# EAGLE board untitled (EAGLE 6.1)
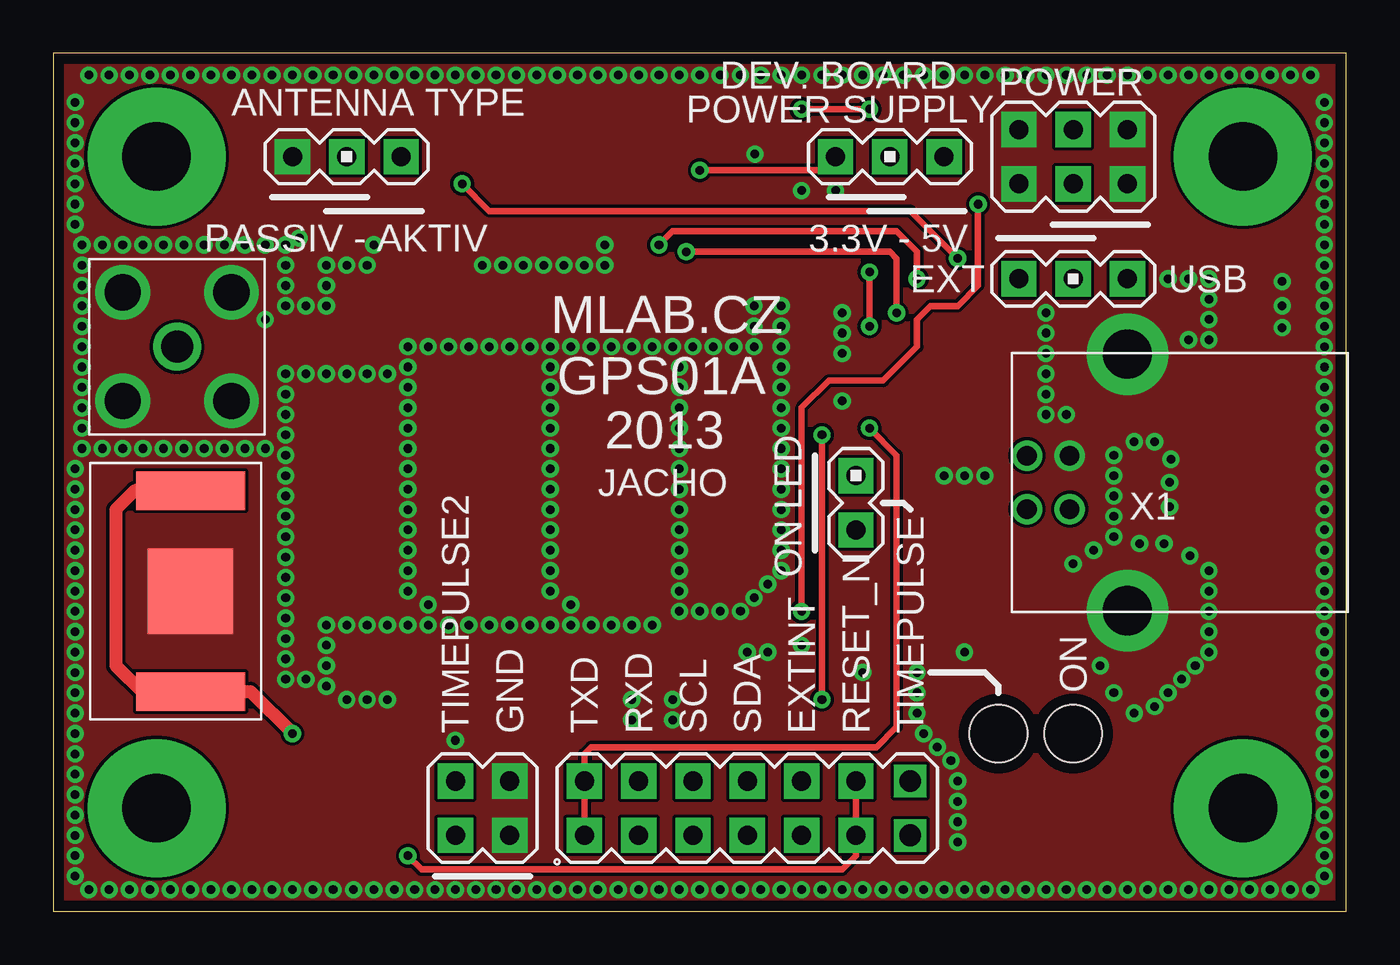
[diagram p0: board, top side]
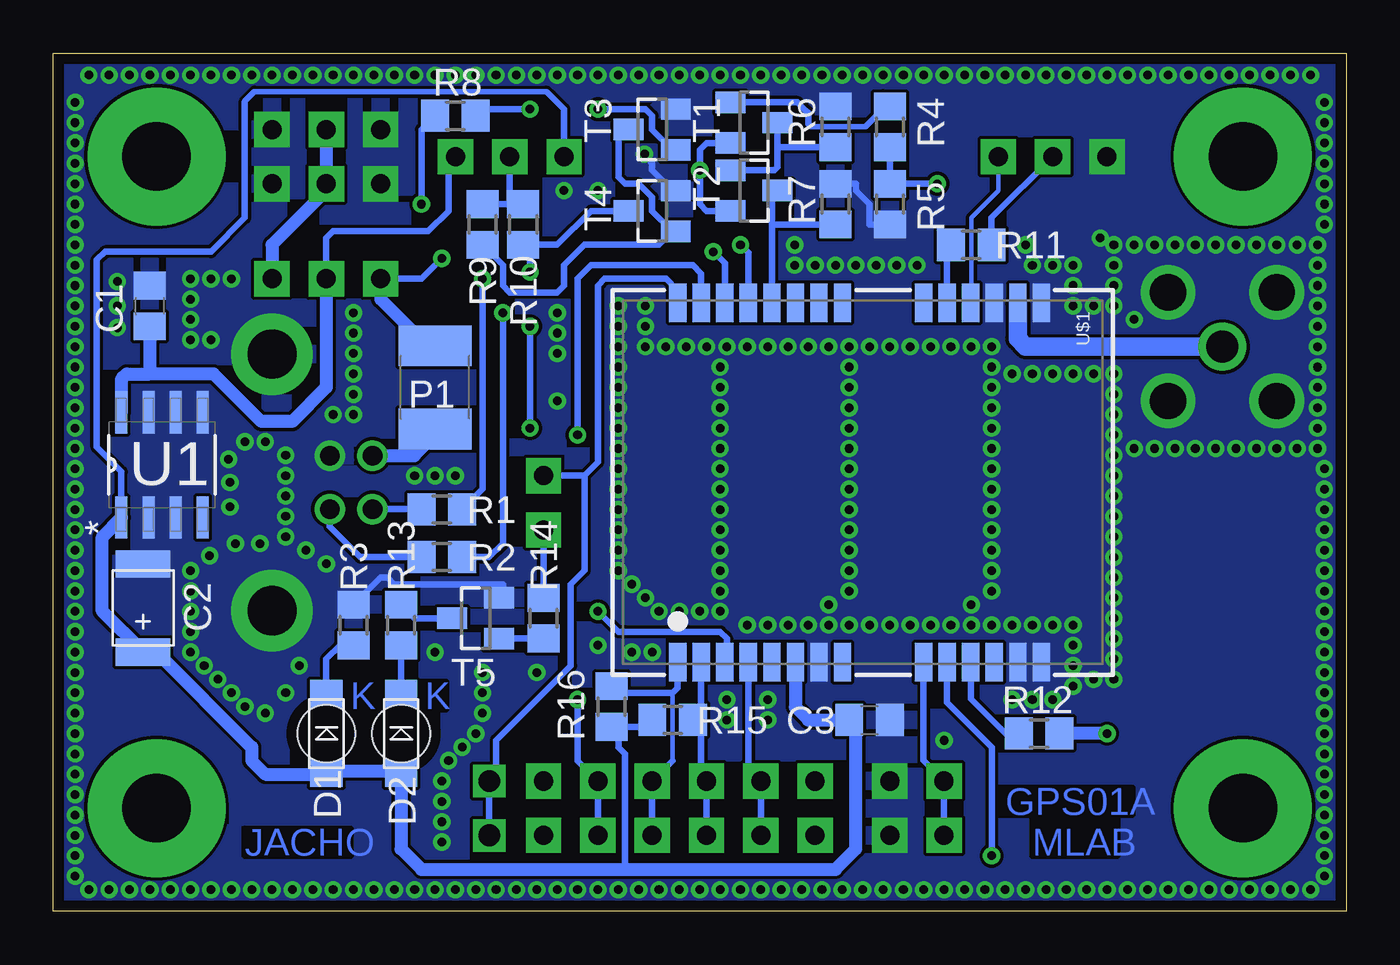
[diagram p1: board, bottom side, seen from below]

Size 60.45 x 40.13 mm. Coordinates in mm from the lower left corner, seen from the top.
Outline: 0,0 60.45,0 60.45,40.13 0,40.13 0,0
Copper layers (1*16): Top 0.035mm / dielectric 1.5mm / Bottom 0.035mm
Design rules: minimum track width 8mil, minimum drill 16mil, track to track 6mil, track to pad 6mil, pad to pad 6mil, via to via 6mil, smd to smd 6mil, copper to edge 20mil, drill to drill 8mil, minimum pad ring 10mil, minimum via ring 8mil, stop-mask expansion 4mil, vias tented up to drill 25mil, thermal gap 0mil

## Footprints (pad centres in the part's own frame; a part is rotated, then mirrored left to right if it is on the bottom)
C0805 = smd 1.3 x 1.5: 1 -0.95,0; 2 0.95,0
B = smd 1.27 x 2.54: + 2.223,0; - -1.905,0
1206 = smd 1.5 x 1.5: A 0,-1.75; K 0,1.75 | hole 2.7: 0,0
1812 = smd 1.9 x 3.4: 1 -1.95,0; 2 1.95,0
0805 = smd 1.3 x 1.5: 1 -0.95,0; 2 0.95,0
MA03-1 = drill 0.889 pad 1.651 square: 1 -2.54,0; 2 0,0; 3 2.54,0
MA03-2 = drill 0.889 pad 1.651 square: 1 -2.54,-1.27; 2 -2.54,1.27; 3 0,-1.27; 4 0,1.27; 5 2.54,-1.27; 6 2.54,1.27
MA02-2 = drill 0.889 pad 1.651 square: 1 -1.27,-1.27; 2 -1.27,1.27; 3 1.27,-1.27; 4 1.27,1.27
MA07-2 = drill 0.889 pad 1.651 square: 1 -7.62,-1.27; 2 -7.62,1.27; 3 -5.08,-1.27; 4 -5.08,1.27; 5 -2.54,-1.27; 6 -2.54,1.27; 7 0,-1.27; 8 0,1.27; 9 2.54,-1.27; 10 2.54,1.27; 11 5.08,-1.27; 12 5.08,1.27 | drill 1.016 square: 13 7.62,-1.27; 14 7.62,1.27
MA02-1 = drill 0.889 pad 1.651 square: 1 -1.27,0; 2 1.27,0
BAT6MM8 = smd 1.8 x 5.1: 1+ -4.7,0; 2+ 4.7,0 | smd 4 x 4: - 0,0
SMA = drill 1.5: + 0,0 | drill 1.7: -1 -2.54,2.54; -2 2.54,2.54; -3 -2.54,-2.54; -4 2.54,-2.54
SOT23 = smd 1 x 1.4: 1 -0.95,-1.1; 2 0.95,-1.1; 3 0,1.1
SOIC127P600X175-8N = smd 1.981 x 0.559: 1 -2.464,1.905; 2 -2.464,0.635; 3 -2.464,-0.635; 4 -2.464,-1.905; 5 2.464,-1.905; 6 2.464,-0.635; 7 2.464,0.635; 8 2.464,1.905
UBLOX-LEA-6 = smd 1.8 x 0.8: 1 8.4,-8.65; 2 8.4,-7.55; 3 8.4,-6.45; 4 8.4,-5.35; 5 8.4,-4.25; 6 8.4,-3.15; 7 8.4,-2.05; 8 8.4,-0.95; 9 8.4,2.85; 10 8.4,3.95; 11 8.4,5.05; 12 8.4,6.15; 13 8.4,7.25; 14 8.4,8.35; 15 -8.4,8.35; 16 -8.4,7.25; 17 -8.4,6.15; 18 -8.4,5.05; 19 -8.4,3.95; 20 -8.4,2.85; 21 -8.4,-0.95; 22 -8.4,-2.05; 23 -8.4,-3.15; 24 -8.4,-4.25; 25 -8.4,-5.35; 26 -8.4,-6.45; 27 -8.4,-7.55; 28 -8.4,-8.65
USB_B = drill 0.92 pad 1.422: 1 1.25,4.7; 2 -1.25,4.7; 3 -1.25,2.7; 4 1.25,2.7 | drill 2.3 pad 3.81: GND -6,0; GND2 6,0
SROUB3M = drill 3.2 pad 6.452: P$1 0,0

## Placement (x,y rotation side)
C1  100nF  [C0805]  55.94,28.32 90 bottom
C2  10uF  [B]  56.26,14.35 270 bottom
C3  100nF  [C0805]  22.29,8.95 0 bottom
D1  CERVENA  [1206]  47.69,8.32 0 bottom
D2  ZELENA  [1206]  44.2,8.32 0 bottom
P1  [1812]  42.61,24.51 90 bottom
R1  33  [0805]  42.29,18.8 0 bottom
R2  33  [0805]  42.29,16.57 0 bottom
R3  150R  [0805]  46.42,13.4 270 bottom
R4  1k  [0805]  21.34,36.7 90 bottom
R5  4k7  [0805]  21.34,33.08 90 bottom
R6  4k7  [0805]  23.88,36.7 270 bottom
R7  4k7  [0805]  23.88,33.08 270 bottom
R8  1k  [0805]  41.66,37.21 0 bottom
R9  4k7  [0805]  40.39,32.13 270 bottom
R10  4k7  [0805]  38.48,32.13 270 bottom
R11  10  [0805]  17.53,31.18 180 bottom
R12  100  [0805]  14.35,8.32 0 bottom
R13  150R  [0805]  44.2,13.4 270 bottom
R14  [0805]  37.53,13.72 270 bottom
R15  4k7  [0805]  31.5,8.95 180 bottom
R16  4k7  [0805]  34.35,9.59 270 bottom
SV1  [MA03-1]  47.69,29.59 180 top
SV2  [MA03-2]  47.69,35.31 180 top
SV3  [MA03-1]  39.12,35.31 0 top
SV4  [MA03-1]  13.72,35.31 0 top
SV5  [MA02-2]  20.07,4.83 0 top
SV6  [MA07-2]  32.45,4.83 0 top
SV7  MA02-1  [MA02-1]  37.53,19.11 90 top
SW1  1.55V  [BAT6MM8]  6.41,14.99 90 top
SW2  [SMA]  5.78,26.42 90 top
T1  BC807  [SOT23]  27.69,36.89 270 bottom
T2  BC807  [SOT23]  27.69,33.72 270 bottom
T3  BC817  [SOT23]  32.45,36.58 90 bottom
T4  BC817  [SOT23]  32.45,32.77 90 bottom
T5  BC817  [SOT23]  40.7,13.72 90 bottom
U1  LE33CD-TR  [SOIC127P600X175-8N]  55.37,20.89 90 bottom
U$1  UBLOX-LEA-6  [UBLOX-LEA-6]  22.61,20.07 270 bottom
X1  [USB_B]  50.23,20.07 90 top
X2  SROUB3M  [SROUB3M]  4.83,4.83 0 top
X3  SROUB3M  [SROUB3M]  4.83,35.31 0 top
X4  SROUB3M  [SROUB3M]  55.63,4.83 0 top
X5  SROUB3M  [SROUB3M]  55.63,35.31 0 top

## Library data of the parts
C1-C3 = moje_C
D1 D2 = moje_diody
P1 X2-X5 = moje
R1-R16 = moje_R
SV1-SV4 SV6 = moje_hrebinky; OC_FARNELL: unknown; OC_NEWARK: unknown
SV5 SV7 = moje_hrebinky
SW1 = moje_baterky
SW2 X1 = moje_konektory
T1-T5 = moje_T
U1 = moje_U; MPN: LE33CD-TR; OC_FARNELL: 1652371; OC_NEWARK: 89K1279; PACKAGE: SOIC-8; SUPPLIER: STMICROELECTRONICS
U$1 = 3DRobotics; DATASHEET: http://www.u-blox.com/images/downloads/Product_Docs/LEA-6_DataSheet_%28GPS.G6-HW-09004%29.pdf; LINK: http://www.u-blox.com/en/gps-modules/pvt-modules/lea-6-family.html; MFGPN: LEA-6

## Nets
+3.3V: C2.+ C3.1 D1.A D2.A R15.2 R16.2 SV3.1 T1.2 T2.2 U1.1 U$1.6
+5V: C1.1 SV1.2 SV3.3 U1.8
EXTINT: SV6.9 SV6.10 U$1.27
GND: C1.2 C2.- C3.2 R3.1 R5.1 R6.1 R7.1 SV2.1 SV2.2 SV2.5 SV2.6 SV4.1 SV5.3 SV5.4 SW1.- SW2.-1 SW2.-2 SW2.-3 SW2.-4 T3.2 T4.2 T5.2 U1.2 U1.3 U1.5 U1.6 U1.7 U$1.7 U$1.13 U$1.14 U$1.15 U$1.17 X1.4 X1.GND X1.GND2
N$1: SW2.+ U$1.16
N$2: SV1.1 SV2.3 SV2.4
N$3: R1.1 X1.2
N$4: R2.1 X1.3
N$5: P1.1 X1.1
N$6: R8.2 T3.1
N$7: R9.2 T3.3 T4.1
N$8: R4.2 T1.1
N$9: D1.K R3.2
N$10: R6.2 T1.3 T2.1
N$11: R11.2 U$1.19
N$12: R9.1 R10.1 SV3.2
N$13: R11.1 SV4.2
N$14: R12.1 U$1.11
N$15: R12.2 SW1.1+ SW1.2+
N$16: SV5.1 SV5.2 U$1.9
N$24: D2.K R13.2
N$25: R13.1 T5.3
N$26: R14.2 T5.1
N$27: R14.1 SV7.1
RESET_N: SV6.11 SV6.12 U$1.10
RXD: SV6.3 SV6.4 U$1.4
SCL: R15.1 SV6.5 SV6.6 U$1.2
SDA: R16.1 SV6.7 SV6.8 U$1.1
TIMEPULSE: SV6.13 SV6.14 SV7.2 U$1.28
TXD: R10.2 SV6.1 SV6.2 T4.3
TXD1: R8.1 U$1.3
USB_DET: R7.2 T2.3 U$1.24
USB_DM: R1.2 U$1.25
USB_DP: R2.2 U$1.26
VCC_RF: SV4.3 U$1.18
VDD_USB: P1.2 R4.1 R5.2 SV1.3

## Tracks (layer width: path | path; a pad name or v marks a point on that pad's centre or on a via)
+3.3V  (via drill 0.4)
  Top 0.305: v30.23,34.67 35.94,34.67 SV3.1
  Bottom 0.254: 51.5,37.85 51.5,37.91 51.05,38.35 37.4,38.35 37.21,38.16
  Bottom 0.305: T2.2 29.91,32.77 30.23,33.08 v30.23,34.67 30.23,35.62 29.91,35.94 T1.2 | R15.2 32.76,8.64 R16.2 34.04,8.64 34.04,7.68 33.72,7.37 33.72,1.97 | 28.64,32.77 T2.2 | T2.2 | 51.5,37.85 51.5,32.45 53.09,30.86 58.04,30.86 58.42,30.48 58.42,21.72 57.28,20.57 U1.1 | SV3.1 36.58,37.53 37.21,38.16
  Bottom 0.61: U$1.6 25.76,9.56 25.15,8.95 C3.1 22.92,8.64 22.92,2.92 23.88,1.97 33.72,1.97 43.24,1.97 44.2,2.92 D2.A D1.A 47.84,6.41 50.55,6.41 51.18,7.05 51.18,7.68 55.63,12.13 C2.+ 58.17,14.03 58.17,17.53 U1.1
+5V
  Bottom 0.305: SV1.2 47.69,31.5 47.37,31.81 42.93,31.81 41.97,32.77 41.97,34.99 SV3.3
  Bottom 0.61: SV1.2 47.69,24.51 49.28,22.92 50.74,22.92 52.96,25.15 55.94,25.15 | C1.1 55.94,25.15 | U1.8 57.28,24.89 57.02,25.15 55.94,25.15
EXTINT  (via drill 0.4)
  Top 0.305: v35.94,22.29 v35.94,9.91
  Bottom 0.305: U$1.27 30.16,29.84 30.54,30.23 35.31,30.23 35.94,29.59 v35.94,22.29 | v35.94,9.91 35.94,7.05 SV6.10 SV6.9
GND  (via drill 0.4)
  Bottom 0.305: R5.1 21.34,32.45 | R5.1 21.34,31.81 | R7.1 22.93,34.03 22.92,34.04 22.92,33.72 22.29,33.08 22.29,32.13 R5.1 | R3.1 45.15,15.62 44.83,15.62 44.51,15.3 39.43,15.3 39.43,14.84 T5.2 | T4.2 31.49,33.72 32.45,34.67 32.45,34.99 v32.81,35.43
  other vias: 11.49,31.5 2.29,31.18 3.24,31.18 4.19,31.18 5.14,31.18 6.1,31.18 7.05,31.18 8,31.18 8.95,31.18 9.91,31.18 10.86,31.18 10.86,30.23 10.86,29.27 10.86,28.32 9.91,27.69 1.33,31.18 1.33,30.23 1.33,29.27 1.33,28.32 1.33,27.37 1.33,26.42 1.33,25.46 1.33,24.51 1.33,23.56 1.33,22.61 1.33,21.65 2.29,21.65 3.24,21.65 4.19,21.65 5.14,21.65 6.1,21.65 7.05,21.65 8,21.65 8.95,21.65 9.91,21.65 10.86,21.34 10.86,22.29 10.86,23.24 10.86,24.19 10.86,25.15 11.81,28.32 11.81,25.15 12.76,28.32 12.76,25.15 13.72,25.15 14.67,25.15 15.62,25.15 16.57,25.46 16.57,26.42 17.53,26.42 18.48,26.42 19.43,26.42 20.38,26.42 21.34,26.42 22.29,26.42 23.24,26.42 24.19,26.42 25.15,26.42 26.1,26.42 27.05,26.42 28,26.42 28.96,26.42 29.91,26.42 30.86,26.42 31.81,26.42 32.77,26.42 32.77,27.37 32.77,28.32 34.04,28.32 34.04,27.37 34.04,26.42 34.04,25.46 34.04,24.51 34.04,23.56 34.04,22.61 34.04,21.65 34.04,20.7 34.04,19.75 34.04,18.8 34.04,17.84 34.04,16.89 34.04,15.94 33.4,15.3 32.77,14.67 32.13,14.03 31.18,14.03 30.23,14.03 29.27,14.03 28,13.4 27.05,13.4 26.1,13.4 25.15,13.4 24.19,13.4 23.24,13.4 22.29,13.4 21.34,13.4 20.38,13.4 19.43,13.4 18.48,13.4 17.53,13.4 16.57,13.4 15.62,13.4 14.67,13.4 13.72,13.4 12.76,13.4 12.76,12.45 12.76,11.49 12.76,10.54 13.72,9.91 14.67,9.91 15.62,9.91 10.86,20.38 10.86,19.43 10.86,18.48 10.86,17.53 10.86,16.57 10.86,15.62 10.86,14.67 10.86,13.72 10.86,12.76 10.86,11.81 10.86,10.86 11.81,10.86 12.76,29.27 12.76,30.23 13.72,30.23 14.67,30.23 14.99,31.18 20.07,30.23 21.02,30.23 21.97,30.23 22.92,30.23 23.88,30.23 24.83,30.23 25.78,30.23 25.78,31.18 29.27,14.99 29.27,15.94 29.27,16.89 29.27,17.84 29.27,18.8 29.27,19.75 29.27,20.7 29.27,21.65 29.27,22.61 29.27,23.56 29.27,24.51 29.27,25.46 23.24,25.46 23.24,24.51 23.24,23.56 23.24,22.61 23.24,21.65 23.24,20.7 23.24,19.75 23.24,18.8 23.24,17.84 23.24,16.89 23.24,15.94 23.24,14.99 24.19,14.35 16.57,24.51 16.57,23.56 16.57,22.61 16.57,21.65 16.57,20.7 16.57,19.75 16.57,18.8 16.57,17.84 16.57,16.89 16.57,15.94 16.57,14.99 17.53,14.35 18.8,8 42.29,3.24 42.29,4.19 42.29,5.14 42.29,6.1 41.97,7.05 41.34,7.68 40.7,8.32 40.39,9.27 40.39,10.22 40.39,11.18 37.85,11.18 42.61,12.13 27.05,9.91 27.05,8.95 28.96,9.91 28.96,8.95 34.99,12.45 32.45,12.13 33.4,12.13 41.66,20.38 42.61,20.38 43.56,20.38 36.89,28 36.89,27.05 36.89,23.88 46.42,28 46.42,27.05 46.42,26.1 46.42,25.15 46.42,24.19 46.42,23.24 47.37,23.24 53.09,26.73 54.04,26.73 54.04,27.69 54.04,28.64 54.04,29.59 53.09,29.59 52.13,29.59 47.69,16.26 48.64,16.89 49.59,17.53 49.59,18.48 49.59,19.43 49.59,20.38 49.59,21.34 50.55,21.97 51.5,21.97 52.2,18.92 50.8,17.21 50.55,9.27 49.59,10.22 48.96,11.49 51.5,9.59 52.13,10.22 52.77,10.86 53.4,11.49 54.04,12.13 54.04,13.08 54.04,14.03 54.04,14.99 54.04,15.94 53.15,16.64 51.94,17.21 52.2,20.07 52.26,21.15 1.65,1.02 2.6,1.02 3.56,1.02 4.51,1.02 5.46,1.02 6.41,1.02 7.37,1.02 8.32,1.02 9.27,1.02 10.22,1.02 11.18,1.02 12.13,1.02 13.08,1.02 14.03,1.02 14.99,1.02 15.94,1.02 16.89,1.02 17.84,1.02 18.8,1.02 19.75,1.02 20.7,1.02 21.65,1.02 22.61,1.02 23.56,1.02 24.51,1.02 25.46,1.02 26.42,1.02 27.37,1.02 28.32,1.02 29.27,1.02 30.23,1.02 31.18,1.02 32.13,1.02 33.08,1.02 34.04,1.02 34.99,1.02 35.94,1.02 36.89,1.02 37.85,1.02 38.8,1.02 39.75,1.02 40.7,1.02 41.66,1.02 42.61,1.02 43.56,1.02 44.51,1.02 45.47,1.02 46.42,1.02 47.37,1.02 48.32,1.02 49.28,1.02 50.23,1.02 51.18,1.02 52.13,1.02 53.09,1.02 54.04,1.02 54.99,1.02 55.94,1.02 56.9,1.02 57.85,1.02 58.8,1.02 1.65,39.12 2.6,39.12 3.56,39.12 4.51,39.12 5.46,39.12 6.41,39.12 7.37,39.12 8.32,39.12 9.27,39.12 10.22,39.12 11.18,39.12 12.13,39.12 13.08,39.12 14.03,39.12 14.99,39.12 15.94,39.12 16.89,39.12 17.84,39.12 18.8,39.12 19.75,39.12 20.7,39.12 21.65,39.12 22.61,39.12 23.56,39.12 24.51,39.12 25.46,39.12 26.42,39.12 27.37,39.12 28.32,39.12 29.27,39.12 30.23,39.12 31.18,39.12 32.13,39.12 33.08,39.12 34.04,39.12 34.99,39.12 35.94,39.12 36.89,39.12 37.85,39.12 38.8,39.12 39.75,39.12 40.7,39.12 41.66,39.12 42.61,39.12 43.56,39.12 44.51,39.12 45.47,39.12 46.42,39.12 47.37,39.12 48.32,39.12 49.28,39.12 50.23,39.12 51.18,39.12 52.13,39.12 53.09,39.12 54.04,39.12 54.99,39.12 55.94,39.12 56.9,39.12 57.85,39.12 58.8,39.12 59.44,1.65 59.44,2.6 59.44,3.56 59.44,4.51 59.44,5.46 59.44,6.41 59.44,7.37 59.44,8.32 59.44,9.27 59.44,10.22 59.44,11.18 59.44,12.13 59.44,13.08 59.44,14.03 59.44,14.99 59.44,15.94 59.44,16.89 59.44,17.84 59.44,18.8 59.44,19.75 59.44,20.7 59.44,21.65 59.44,22.61 59.44,23.56 59.44,24.51 59.44,25.46 59.44,26.42 59.44,27.37 59.44,28.32 59.44,29.27 59.44,30.23 59.44,31.18 59.44,32.13 59.44,33.08 59.44,34.04 59.44,34.99 59.44,35.94 59.44,36.89 59.44,37.85 1.02,1.65 1.02,2.6 1.02,3.56 1.02,4.51 1.02,5.46 1.02,6.41 1.02,7.37 1.02,8.32 1.02,9.27 1.02,10.22 1.02,11.18 1.02,12.13 1.02,13.08 1.02,14.03 1.02,14.99 1.02,15.94 1.02,16.89 1.02,17.84 1.02,18.8 1.02,19.75 1.02,20.7 1.02,32.13 1.02,33.08 1.02,34.04 1.02,34.99 1.02,35.94 1.02,36.89 1.02,37.85 34.99,33.72 36.58,33.72 36.89,26.1 57.47,29.46 57.47,28.32 57.47,27.3
  pour Bottom: -0.25,40.39 -0.57,40.39 -0.57,-0.25 61.34,-0.25 61.34,40.39
  pour Top: -0.25,40.39 -0.57,40.39 -0.57,0.06 -0.57,-0.57 61.02,-0.57 61.02,40.39
N$1
  Bottom 0.861: U$1.16 15.36,26.79 14.99,26.42 SW2.+
N$2
  Bottom 0.61: SV2.3 SV2.4 47.69,33.72 50.23,31.18 SV1.1
N$3
  Bottom 0.305: X1.2 43.26,18.82 R1.1
N$4
  Bottom 0.305: X1.3 47.53,18 46.1,16.57 R2.1
N$5
  Bottom 0.61: X1.1 43.58,21.32 42.29,22.61 P1.1
N$6  (via drill 0.4)
  Top 0.305: v34.99,37.53 v38.16,37.53
  Bottom 0.305: 31.18,35.63 T3.1 31.5,35.63 32.45,36.58 32.45,37.21 32.77,37.53 v34.99,37.53 | R8.2 40.39,37.53 v38.16,37.53
N$7
  Bottom 0.305: 31.5,31.82 T4.1 | 31.5,31.82 32.45,32.77 32.45,33.4 33.08,34.04 33.72,34.04 34.04,34.35 34.04,36.58 33.72,36.58 T3.3 33.4,36.58 | 31.5,31.82 31.5,31.81 32.13,31.18 35.62,31.18 36.58,30.23 36.58,29.27 36.89,28.96 39.12,28.96 39.43,29.27 39.43,30.23 R9.2
N$8
  Bottom 0.254: 22.35,36.83 22.48,36.7 25.02,36.7 25.15,36.83
  Bottom 0.305: R4.2 21.66,38.16 21.66,37.53 22.35,36.83 | T1.1 25.65,37.85 25.27,37.47 25.15,37.34 25.15,36.83
N$9
  Bottom 0.305: R3.2 47.05,12.45 47.69,11.81 D1.K 47.69,9.91
N$10
  Bottom 0.305: T1.3 26.59,36.26 | 26.59,36.26 26.59,35.81 | 26.59,35.81 26.59,34.82 26.73,34.67 T2.1 | 26.58,36.26 26.59,36.26 | R6.2 26.52,35.75 26.59,35.81
N$11
  Bottom 0.305: U$1.19 18.66,31 R11.2
N$12
  Bottom 0.305: R10.1 39.12,33.08 | 39.12,33.08 R9.1 | SV3.2 39.12,33.08
N$13
  Bottom 0.305: R11.1 16.58,32.45 SV4.2
N$14
  Bottom 0.305: U$1.11 17.56,9.94 15.94,8.32 R12.1
N$15  (via drill 0.4)
  Top 0.61: SW1.2+ 3.81,19.69 2.92,18.8 2.92,11.49 4.19,10.22 6.35,10.22 SW1.1+ 9.21,10.29 v11.18,8.32
  Bottom 0.61: v11.18,8.32 R12.2
N$16
  Bottom 0.305: U$1.9 19.76,7.06 SV5.2 SV5.1
N$24
  Bottom 0.305: R13.2 D2.K
N$25
  Bottom 0.305: T5.3 43.56,13.72 R13.1
N$26
  Bottom 0.305: T5.1 R14.2
N$27
  Bottom 0.305: R14.1 SV7.1
RESET_N  (via drill 0.4)
  Top 0.305: v16.57,2.6 17.21,1.97 36.89,1.97 37.53,2.6 SV6.11 SV6.12
  Bottom 0.305: v16.57,2.6 16.57,7.68 18.66,9.77 U$1.10
RXD
  Bottom 0.305: U$1.4 27.96,6.68 SV6.4 SV6.3
SCL
  Bottom 0.305: U$1.2 30.16,8.95 | 30.16,8.95 30.16,6.34 SV6.6 SV6.5 | R15.1 30.16,8.95
SDA
  Bottom 0.203: 31.5,10.22 31.5,7.05
  Bottom 0.305: 31.5,7.05 SV6.8 SV6.7 | 31.18,11.49 31.18,11.59 U$1.1 31.26,10.46 31.5,10.22 34.35,10.22 R16.1
TIMEPULSE
  Bottom 0.305: U$1.28 31.26,29.03 31.81,29.59 34.67,29.59 34.99,29.27 34.99,21.02 35.62,20.38 | 35.62,20.38 35.62,15.94 36.26,15.3 36.26,11.49 39.75,8 39.75,6.41 SV6.14 SV6.13 | SV7.2 35.62,20.38
TXD  (via drill 0.4)
  Top 0.305: v38.16,29.91 v38.16,27.37 | v38.16,22.61 39.43,21.34 39.43,8.64 38.48,7.68 25.15,7.68 24.83,7.37 SV6.2 SV6.1
  Bottom 0.305: T4.3 35.31,32.77 36.89,31.18 38.16,31.18 | 38.16,31.18 R10.2 | 38.16,31.18 v38.16,29.91 | v38.16,27.37 v38.16,22.61
TXD1  (via drill 0.4)
  Top 0.305: v43.24,33.08 43.24,29.27 42.29,28.32 41.02,28.32 40.39,27.69 40.39,26.42 38.8,24.83 36.26,24.83 34.99,23.56 v34.99,14.03
  Bottom 0.305: R8.1 43.24,36.58 v43.24,33.08 | U$1.3 28.96,11.77 28.96,12.76 29.27,13.08 34.04,13.08 v34.99,14.03
USB_DET
  Bottom 0.305: U$1.24 26.86,32.13 | 26.86,32.13 26.86,33.6 26.73,33.72 T2.3 | R7.2 26.85,32.13 26.86,32.13
USB_DM  (via drill 0.4)
  Top 0.305: v28.32,31.18 28.96,31.81 39.43,31.81 40.39,30.86 v40.39,29.59
  Bottom 0.305: U$1.25 27.96,30.81 v28.32,31.18 | R1.2 40.39,19.75 v40.39,29.59
USB_DP  (via drill 0.4)
  Top 0.305: v29.59,30.86 39.12,30.86 39.43,30.54 v39.43,28
  Bottom 0.305: U$1.26 29.06,30.33 v29.59,30.86 | R2.2 40.07,16.57 39.43,17.21 v39.43,28
VCC_RF
  Bottom 0.204: SV4.3 16.26,33.72 17.53,32.45 17.53,28.5 U$1.18
VDD_USB  (via drill 0.4)
  Top 0.305: v42.29,30.54 40.07,32.77 20.38,32.77 v19.11,34.04
  Bottom 0.305: R4.1 R5.2 v19.11,34.04 | SV1.3 43.24,29.59 v42.29,30.54
  Bottom 0.61: SV1.3 45.15,28.64 42.93,26.42 42.88,26.46 P1.2

## Text on the board
Bottom: GPS01A | MLAB | JACHO
tPlace: DEV. BOARD | POWER | ANTENNA TYPE | POWER SUPPLY | PASSIV - AKTIV | 3.3V - 5V | EXT | USB | MLAB.CZ | GPS01A | 2013 | JACHO | ON LED | ON | TIMEPULSE2 | GND | TXD | RXD | SCL | SDA | EXTINT | RESET_N | TIMEPULSE
bNames: T5